# EAGLE board mod_switch_battery_voltage (EAGLE 8.4.1)
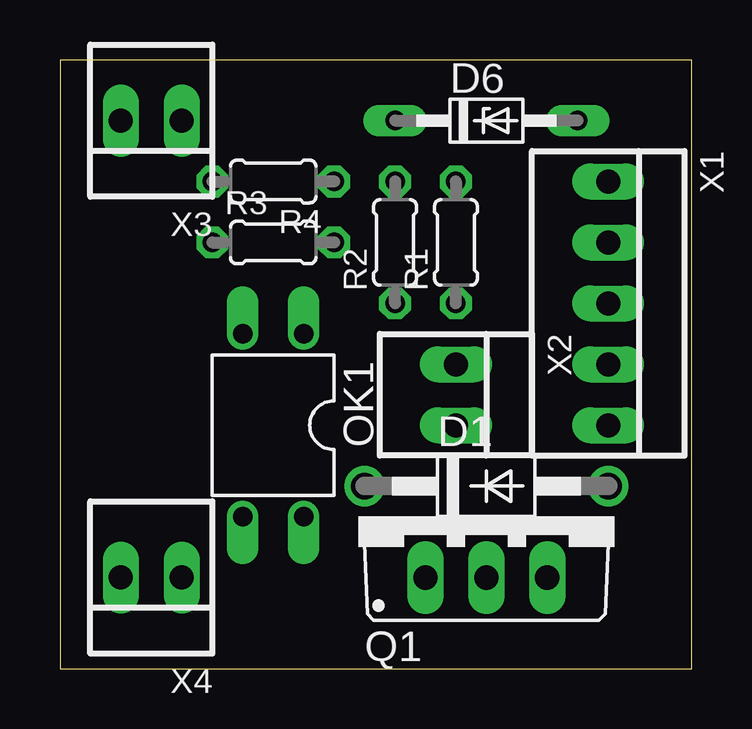
[diagram p0: board, top side]
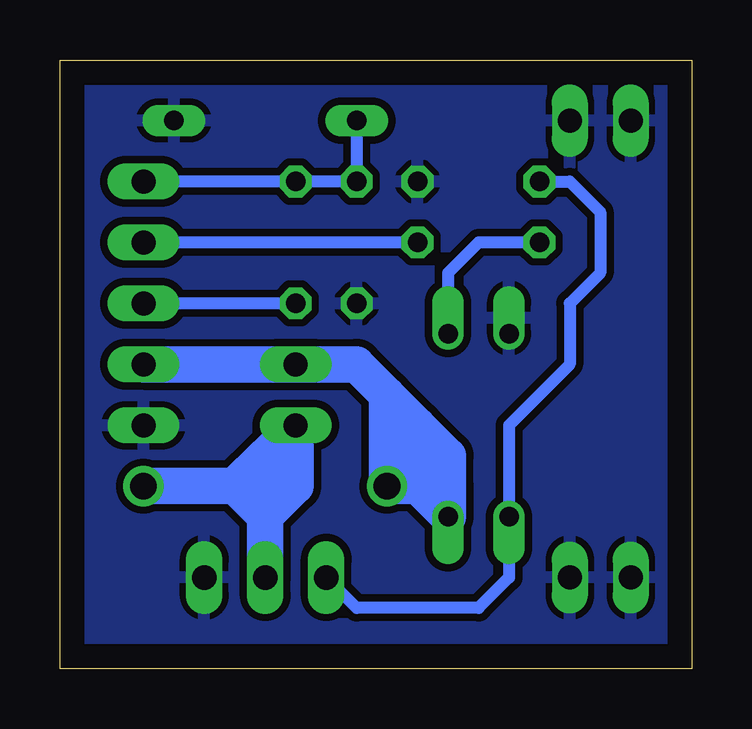
[diagram p1: board, bottom side, seen from below]

Size 26.34 x 25.39 mm. Coordinates in mm from the lower left corner, seen from the top.
Outline: 0,0 26.34,0 26.34,25.39 0,25.39 0,0
Copper layers (1*16): Top 0.035mm / dielectric 1.5mm / Bottom 0.035mm
Design rules "default": minimum track width 6mil, minimum drill 0.35mm, track to track 6mil, track to pad 6mil, pad to pad 6mil, via to via 6mil, smd to smd 6mil, copper to edge 40mil, drill to drill 6mil, minimum pad ring 10mil, minimum via ring 8mil, stop-mask expansion 4mil, vias tented up to drill 0mil, thermal gap 10mil

## Footprints (pad centres in the part's own frame; a part is rotated, then mirrored left to right if it is on the bottom)
DO41-10 = drill 1.118: A 5.08,0; C -5.08,0
DO34Z7 = drill 0.813 long: A 3.81,0; C -3.81,0
DIL04 = drill 0.813 offset: 1 -1.27,-3.81; 2 1.27,-3.81; 3 1.27,3.81; 4 -1.27,3.81
TO220BV = drill 1.016 long: D 0,-2.54; G -2.54,-2.54; S 2.54,-2.54
0204/5 = drill 0.813 octagon: 1 -2.54,0; 2 2.54,0
22-23-2051 = drill 1 long: 1 -5.08,0; 2 -2.54,0; 3 0,0; 4 2.54,0; 5 5.08,0
22-23-2021 = drill 1 long: 1 -1.27,0; 2 1.27,0

## Placement (x,y rotation side)
D1  1N4004  [DO41-10]  17.78,7.62 0 top
D6  [DO34Z7]  17.78,22.86 0 top
OK1  PC817  [DIL04]  8.89,10.16 180 top
Q1  IRF540  [TO220BV]  17.78,6.35 0 top
R1  [0204/5]  16.51,17.78 90 top
R2  [0204/5]  13.97,17.78 90 top
R3  [0204/5]  8.89,17.78 0 top
R4  [0204/5]  8.89,20.32 180 top
X1  22-23-2051  [22-23-2051]  22.86,15.24 270 top
X2  22-23-2021  [22-23-2021]  16.51,11.43 270 top
X3  22-23-2021  [22-23-2021]  3.81,22.86 180 top
X4  22-23-2021  [22-23-2021]  3.81,3.81 180 top

## Library data of the parts
D1 D6 = diode
OK1 = optocoupler; MPN: PC817X4J000F; OC_FARNELL: 9707727; OC_NEWARK: 97K7059
Q1 = transistor-power
R1-R4 = resistor
X1 = con-molex; MF: MOLEX; MPN: 22-23-2051; OC_FARNELL: 1462952; OC_NEWARK: 38C9178
X2-X4 = con-molex; MF: MOLEX; MPN: 22-23-2021; OC_FARNELL: 1462926; OC_NEWARK: 25C3832

## Nets
12V: D1.C OK1.4 X1.4 X2.1
BAT: R1.1 X1.3
GND: D6.A OK1.2 Q1.S R2.1 R4.1 X1.5 X3.1 X3.2 X4.1 X4.2
N$4: OK1.1 R3.1
N$5: D1.A Q1.D X2.2
N$6: R3.2 X1.2
N$7: OK1.3 Q1.G R4.2
N$43: D6.C R1.2 R2.2 X1.1

## Tracks (layer width: path | path; a pad name or v marks a point on that pad's centre or on a via)
12V
  Bottom 1.524: X1.4 X2.1 13.97,12.7 12.7,11.43 | 12.7,11.43 11.43,10.16 | 11.43,10.16 10.16,8.89 10.16,7.62 | 10.16,7.62 OK1.4 11.43,7.62 | 11.43,7.62 10.16,7.62 | 11.43,7.62 D1.C | D1.C 11.43,8.89 11.43,10.16 | D1.C 12.7,11.43
BAT
  Bottom 0.508: R1.1 X1.3
GND
  pour Bottom (isolate 0.305): -21.59,25.4 12.7,25.4 78.74,25.4 78.74,2.54 78.74,-54.61 36.83,-54.61 -21.59,-54.61
N$4
  Bottom 0.508: R3.1 8.89,17.78 10.16,16.51 OK1.1
N$5
  Bottom 1.524: 19.05,7.62 D1.A | 17.78,8.89 19.05,7.62 | 17.78,8.89 X2.2 16.51,7.62 17.78,6.35 | 17.78,6.35 Q1.D 17.78,6.35 | 17.78,6.35 17.78,8.89 | 17.78,6.35 19.05,7.62
N$6
  Bottom 0.508: R3.2 X1.2
N$7
  Bottom 0.508: R4.2 5.08,20.32 3.81,19.05 3.81,16.51 5.08,15.24 5.08,12.7 7.62,10.16 OK1.3 7.62,3.81 8.89,2.54 13.97,2.54 Q1.G
N$43
  Bottom 0.508: X1.1 R1.2 R2.2 D6.C